# EAGLE board umoto_panelized_5x5cm (EAGLE 5.12)
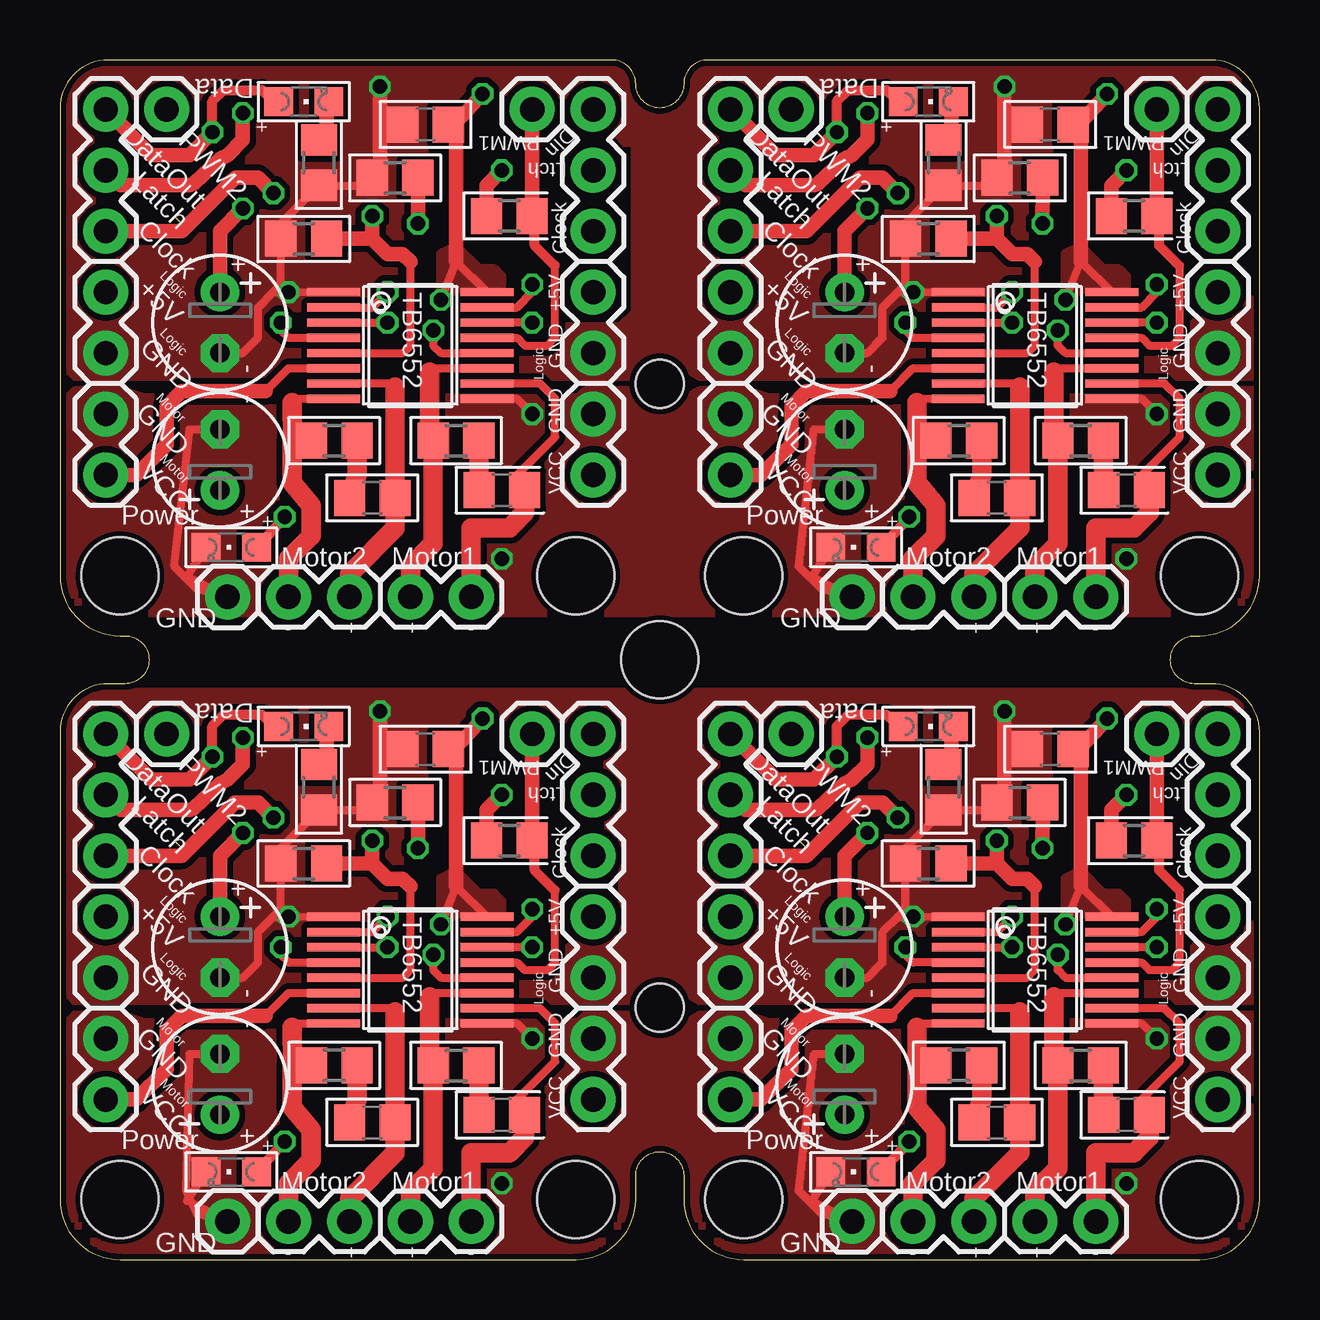
[diagram p0: board, top side]
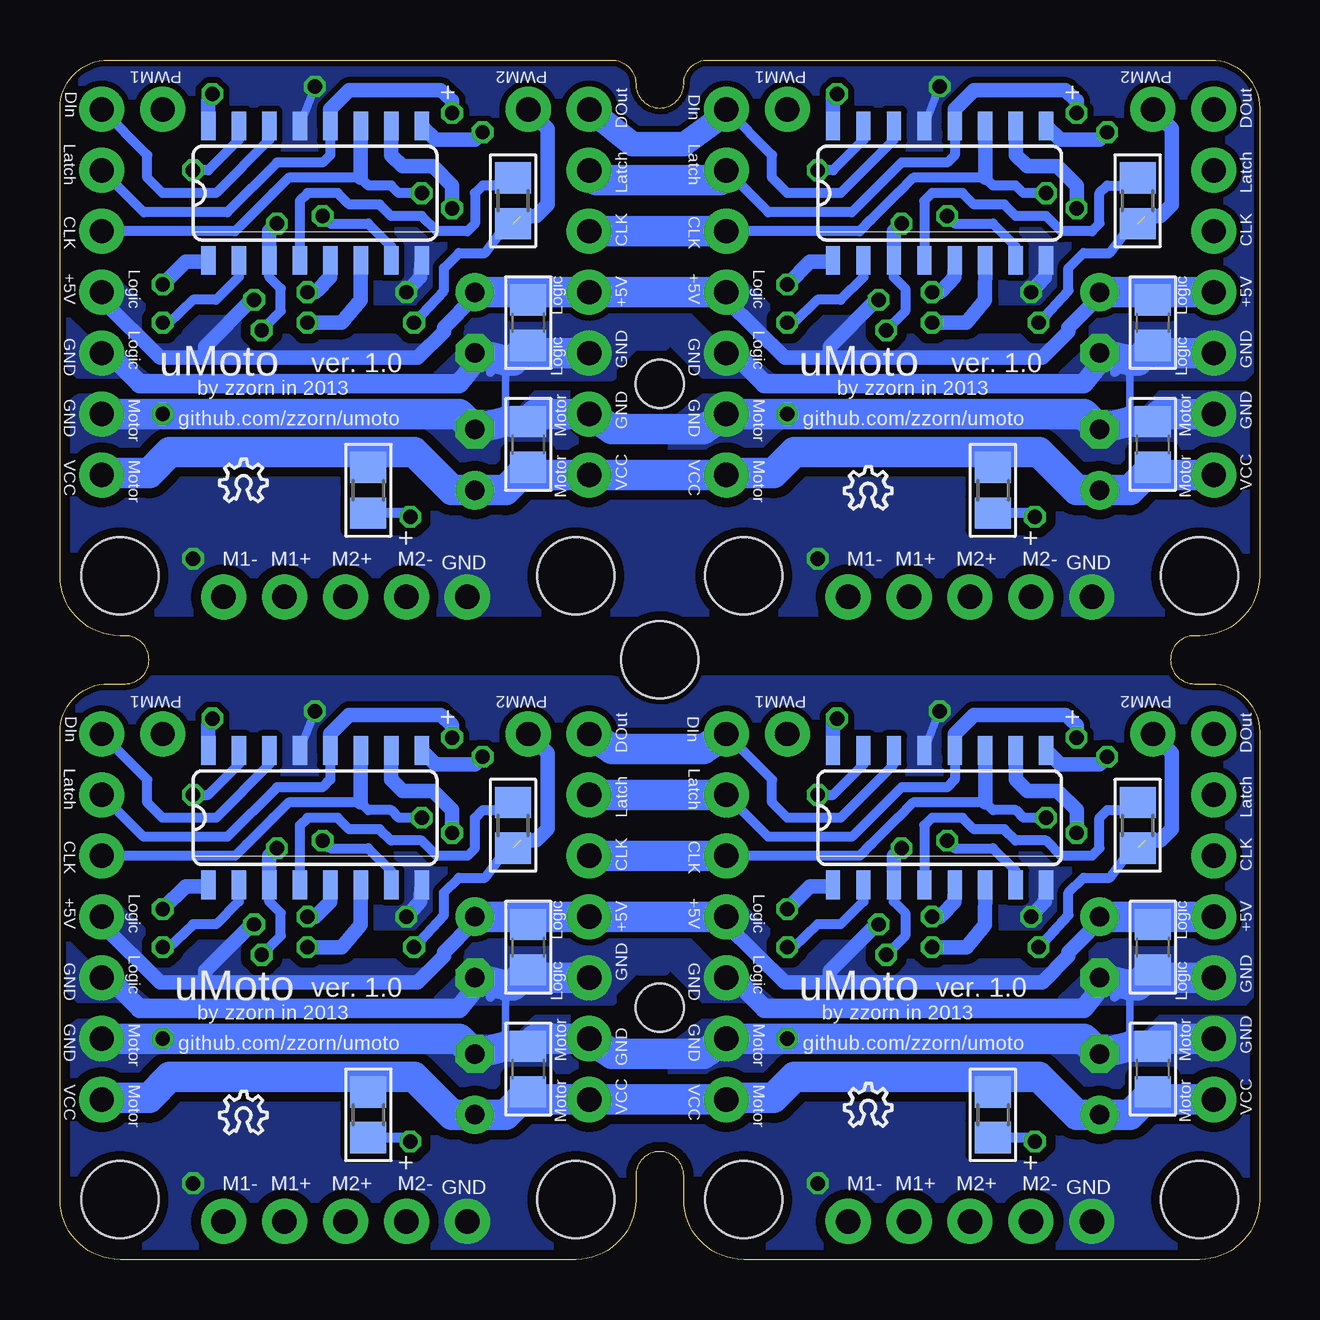
[diagram p1: board, bottom side, seen from below]

Size 50 x 50 mm. Coordinates in mm from the lower left corner, seen from the top.
Outline: 0,2.5 arc90 2.5,0 21.5,0 arc90 24,2.5 24,3.5 arc-180 26,3.5 26,2.5 arc90 28.5,0 47.5,0 arc90 50,2.5 50,22 arc90 48,24 47.29,24 arc-180 47.29,26 47.5,26 arc90 50,28.5 50,48 arc90 48,50 27,50 arc90 26,49 arc-180 24,49 arc90 23,50 2,50 arc90 0,48 0,28.5 arc90 2.5,26 2.71,26 arc-180 2.71,24 2,24 arc90 0,22 0,2.5
Copper layers (1*16): Top 0.035mm / dielectric 0.2mm / Bottom 0.035mm
Design rules "SeeedStudio_DRU_no_angle_20130527 *": minimum track width 6mil, minimum drill 12mil, track to track 6mil, track to pad 6mil, pad to pad 6mil, via to via 6mil, smd to smd 0mil, copper to edge 10mil, drill to drill 10mil, minimum pad ring 6mil, minimum via ring 6mil, stop-mask expansion 2mil, vias tented up to drill 25mil, thermal gap 10mil
Holes 3.2 mm at 21.5,2.5 2.5,2.5 47.5,2.5 28.5,2.5 21.5,28.5 2.5,28.5 47.5,28.5 28.5,28.5 25,25
Holes 2 mm at 25,10.5 25,36.5

## Footprints (pad centres in the part's own frame; a part is rotated, then mirrored left to right if it is on the bottom)
1X02 = drill 1.016 pad 1.88 round: 1 0,0; 2 2.54,0
C0805 = smd 1.3 x 1.5: 1 -0.95,0; 2 0.95,0
E2,5-6 = drill 0.813 pad 1.6 round: + -1.27,0 | drill 0.813 pad 1.6 octagon: - 1.27,0
1X03 = drill 1.016 pad 1.88 round: 1 0,0; 2 2.54,0; 3 5.08,0
SSOP16 = smd 2.2 x 0.35: P$1 -3.2,2.223; P$2 -3.2,1.587; P$3 -3.2,0.953; P$4 -3.2,0.318; P$5 -3.2,-0.318; P$6 -3.2,-0.953; P$7 -3.2,-1.587; P$8 -3.2,-2.223; P$9 3.2,-2.223; P$10 3.2,-1.587; P$11 3.2,-0.953; P$12 3.2,-0.318; P$13 3.2,0.318; P$14 3.2,0.953; P$15 3.2,1.587; P$16 3.2,2.223
1X01 = drill 1.016 pad 1.88 round: 1 0,0
SO16 = smd 0.6 x 1.2: 1 -4.445,-2.8; 2 -3.175,-2.8; 3 -1.905,-2.8; 4 -0.635,-2.8; 5 0.635,-2.8; 6 1.905,-2.8; 7 3.175,-2.8; 8 4.445,-2.8; 9 4.445,2.8; 10 3.175,2.8; 11 1.905,2.8; 12 0.635,2.8; 13 -0.635,2.8; 14 -1.905,2.8; 15 -3.175,2.8; 16 -4.445,2.8
CHIPLED_0805 = smd 1.2 x 1.2: A 0,-1.05; C 0,1.05
R0805 = smd 1.3 x 1.5: 1 -0.95,0; 2 0.95,0

## Placement (x,y rotation side)
5V_PWR  [1X02]  1.91,14.29 270 top
5V_PWR1  [1X02]  22.23,14.29 270 top
5V_PWR2  [1X02]  27.94,14.29 270 top
5V_PWR3  [1X02]  48.26,14.29 270 top
5V_PWR4  [1X02]  1.91,40.32 270 top
5V_PWR5  [1X02]  22.23,40.32 270 top
5V_PWR6  [1X02]  27.94,40.32 270 top
5V_PWR7  [1X02]  48.26,40.32 270 top
C1  100nF  [C0805]  4.45,13.02 270 bottom
C2  100nF  [C0805]  13.02,5.71 180 top
C3  100nF  [C0805]  18.41,6.03 180 top
C4  100nF  [C0805]  30.48,13.02 270 bottom
C5  100uF  [E2,5-6]  6.67,7.3 90 top
C6  100uF  [E2,5-6]  32.7,7.3 90 top
C7  100uF  [E2,5-6]  32.7,13.02 270 top
C8  100uF  [E2,5-6]  6.67,13.02 270 top
C9  100nF  [C0805]  4.45,7.94 90 bottom
C10  100nF  [C0805]  15.24,21.27 180 top
C11  100nF  [C0805]  30.48,7.94 90 bottom
C12  100nF  [C0805]  41.27,21.27 180 top
C13  100nF  [C0805]  39.05,5.71 180 top
C14  100nF  [C0805]  44.45,6.03 180 top
C15  100nF  [C0805]  4.45,39.05 270 bottom
C16  100uF  [E2,5-6]  6.67,33.34 90 top
C17  100uF  [E2,5-6]  6.67,39.05 270 top
C18  100nF  [C0805]  4.45,33.97 90 bottom
C19  100nF  [C0805]  15.24,47.31 180 top
C20  100nF  [C0805]  13.02,31.75 180 top
C21  100nF  [C0805]  18.41,32.07 180 top
C22  100nF  [C0805]  30.48,39.05 270 bottom
C23  100uF  [E2,5-6]  32.7,33.34 90 top
C24  100uF  [E2,5-6]  32.7,39.05 270 top
C25  100nF  [C0805]  30.48,33.97 90 bottom
C26  100nF  [C0805]  41.27,47.31 180 top
C27  100nF  [C0805]  39.05,31.75 180 top
C28  100nF  [C0805]  44.45,32.07 180 top
COMM_IN  [1X03]  22.23,21.91 270 top
COMM_IN1  [1X03]  48.26,21.91 270 top
COMM_IN2  [1X03]  22.23,47.94 270 top
COMM_IN3  [1X03]  48.26,47.94 270 top
COMM_OUT  [1X03]  1.91,21.91 270 top
COMM_OUT1  [1X03]  27.94,21.91 270 top
COMM_OUT2  [1X03]  1.91,47.94 270 top
COMM_OUT3  [1X03]  27.94,47.94 270 top
DRV1  TB6552FN  [SSOP16]  14.61,12.06 0 top
DRV2  TB6552FN  [SSOP16]  40.64,12.06 0 top
DRV3  TB6552FN  [SSOP16]  14.61,38.1 0 top
DRV4  TB6552FN  [SSOP16]  40.64,38.1 0 top
GND  M01PTH  [1X01]  6.99,1.59 0 top
GND1  M01PTH  [1X01]  33.02,1.59 0 top
GND2  M01PTH  [1X01]  6.99,27.62 0 top
GND3  M01PTH  [1X01]  33.02,27.62 0 top
IC1  74LS595D  [SO16]  39.37,18.41 0 bottom
IC2  74LS595D  [SO16]  13.34,44.45 0 bottom
IC3  74LS595D  [SO16]  13.34,18.41 0 bottom
IC4  74LS595D  [SO16]  39.37,44.45 0 bottom
LED1  [CHIPLED_0805]  7.14,3.65 90 top
LED2  [CHIPLED_0805]  10.16,22.23 270 top
LED3  [CHIPLED_0805]  33.18,3.65 90 top
LED4  [CHIPLED_0805]  36.2,22.23 270 top
LED5  [CHIPLED_0805]  7.14,29.69 90 top
LED6  [CHIPLED_0805]  10.16,48.26 270 top
LED7  [CHIPLED_0805]  33.18,29.69 90 top
LED8  [CHIPLED_0805]  36.2,48.26 270 top
LOGO1  OSHW_LOGO_6MILX0070-NT  [OSHW_6X70_NOTEXT]  17.3,5.56 0 bottom
LOGO2  OSHW_LOGO_6MILX0070-NT  [OSHW_6X70_NOTEXT]  43.34,5.24 0 bottom
LOGO3  OSHW_LOGO_6MILX0070-NT  [OSHW_6X70_NOTEXT]  17.3,31.27 0 bottom
LOGO4  OSHW_LOGO_6MILX0070-NT  [OSHW_6X70_NOTEXT]  43.34,31.59 0 bottom
M1  [1X02]  14.61,1.59 0 top
M2  [1X02]  9.53,1.59 0 top
M3  [1X02]  35.56,1.59 0 top
M4  [1X02]  40.64,1.59 0 top
M5  [1X02]  9.53,27.62 0 top
M6  [1X02]  14.61,27.62 0 top
M7  [1X02]  35.56,27.62 0 top
M8  [1X02]  40.64,27.62 0 top
MOTOR_POWER  [1X02]  1.91,9.21 270 top
MOTOR_POWER1  [1X02]  22.23,9.21 270 top
MOTOR_POWER2  [1X02]  27.94,9.21 270 top
MOTOR_POWER3  [1X02]  48.26,9.21 270 top
MOTOR_POWER4  [1X02]  1.91,35.24 270 top
MOTOR_POWER5  [1X02]  22.23,35.24 270 top
MOTOR_POWER6  [1X02]  27.94,35.24 270 top
MOTOR_POWER7  [1X02]  48.26,35.24 270 top
PWM1  M01PTH  [1X01]  19.68,21.91 0 top
PWM2  M01PTH  [1X01]  4.45,21.91 0 top
PWM3  M01PTH  [1X01]  30.48,21.91 0 top
PWM4  M01PTH  [1X01]  45.72,21.91 0 top
PWM5  M01PTH  [1X01]  4.45,47.94 0 top
PWM6  M01PTH  [1X01]  19.68,47.94 0 top
PWM7  M01PTH  [1X01]  30.48,47.94 0 top
PWM8  M01PTH  [1X01]  45.72,47.94 0 top
R1  47R  [R0805]  11.43,8.1 0 top
R2  150R  [R0805]  11.11,6.03 90 bottom
R3  47R  [R0805]  16.51,8.09 0 top
R4  10kR  [R0805]  5.08,18.1 270 bottom
R5  10kR  [R0805]  18.73,17.46 180 top
R6  10kR  [R0805]  10.16,16.51 0 top
R7  10kR  [R0805]  13.97,19.05 0 top
R8  820R  [R0805]  10.79,19.68 90 top
R9  150R  [R0805]  37.15,6.03 90 bottom
R10  10kR  [R0805]  31.11,18.1 270 bottom
R11  10kR  [R0805]  44.77,17.46 180 top
R12  10kR  [R0805]  40.01,19.05 0 top
R13  10kR  [R0805]  36.2,16.51 0 top
R14  820R  [R0805]  36.83,19.68 90 top
R15  47R  [R0805]  37.47,8.1 0 top
R16  47R  [R0805]  42.55,8.09 0 top
R17  150R  [R0805]  11.11,32.07 90 bottom
R18  10kR  [R0805]  5.08,44.13 270 bottom
R19  10kR  [R0805]  18.73,43.5 180 top
R20  10kR  [R0805]  13.97,45.09 0 top
R21  10kR  [R0805]  10.16,42.55 0 top
R22  820R  [R0805]  10.79,45.72 90 top
R23  47R  [R0805]  11.43,34.13 0 top
R24  47R  [R0805]  16.51,34.13 0 top
R25  150R  [R0805]  37.15,32.07 90 bottom
R26  10kR  [R0805]  31.11,44.13 270 bottom
R27  10kR  [R0805]  44.77,43.5 180 top
R28  10kR  [R0805]  40.01,45.09 0 top
R29  10kR  [R0805]  36.2,42.55 0 top
R30  820R  [R0805]  36.83,45.72 90 top
R31  47R  [R0805]  37.47,34.13 0 top
R32  47R  [R0805]  42.55,34.13 0 top

## Library data of the parts
5V_PWR 5V_PWR1-5V_PWR7 COMM_IN COMM_IN1-COMM_IN3 COMM_OUT COMM_OUT1-COMM_OUT3 GND GND1-GND3 IC1-IC4 M1-M8 MOTOR_POWER MOTOR_POWER1-MOTOR_POWER7 PWM1-PWM8 = SparkFun
C1-C28 R1-R32 = rcl
DRV1-DRV4 = TB6552
LED1-LED8 = led
LOGO1-LOGO4 = ohw-logo

## Nets
+5V: 5V_PWR1.1 5V_PWR.1 C1.1 C8.+ C10.1 DRV1.P$16 IC3.10 IC3.16
+5V1: 5V_PWR2.1 5V_PWR3.1 C4.1 C7.+ C12.1 DRV2.P$16 IC1.10 IC1.16
+5V2: 5V_PWR4.1 5V_PWR5.1 C15.1 C17.+ C19.1 DRV3.P$16 IC2.10 IC2.16
+5V3: 5V_PWR6.1 5V_PWR7.1 C22.1 C24.+ C26.1 DRV4.P$16 IC4.10 IC4.16
CLOCK: COMM_IN.3 COMM_OUT.3 IC3.11
CLOCK1: COMM_IN1.3 COMM_OUT1.3 IC1.11
CLOCK2: COMM_IN2.3 COMM_OUT2.3 IC2.11
CLOCK3: COMM_IN3.3 COMM_OUT3.3 IC4.11
DATA_IN: COMM_IN.1 IC3.14
DATA_IN1: COMM_IN1.1 IC1.14
DATA_IN2: COMM_IN2.1 IC2.14
DATA_IN3: COMM_IN3.1 IC4.14
DATA_OUT: COMM_OUT.1 IC3.9 LED2.A
DATA_OUT1: COMM_OUT1.1 IC1.9 LED4.A
DATA_OUT2: COMM_OUT2.1 IC2.9 LED6.A
DATA_OUT3: COMM_OUT3.1 IC4.9 LED8.A
GND: 5V_PWR1.2 5V_PWR.2 C1.2 C5.- C8.- C9.2 C10.2 DRV1.P$1 DRV1.P$9 GND.1 IC3.8 IC3.13 LED1.C MOTOR_POWER1.1 MOTOR_POWER.1 R6.1 R7.1 R8.1
GND1: 5V_PWR2.2 5V_PWR3.2 C4.2 C6.- C7.- C11.2 C12.2 DRV2.P$1 DRV2.P$9 GND1.1 IC1.8 IC1.13 LED3.C MOTOR_POWER2.1 MOTOR_POWER3.1 R12.1 R13.1 R14.1
GND2: 5V_PWR4.2 5V_PWR5.2 C15.2 C16.- C17.- C18.2 C19.2 DRV3.P$1 DRV3.P$9 GND2.1 IC2.8 IC2.13 LED5.C MOTOR_POWER4.1 MOTOR_POWER5.1 R20.1 R21.1 R22.1
GND3: 5V_PWR6.2 5V_PWR7.2 C22.2 C23.- C24.- C25.2 C26.2 DRV4.P$1 DRV4.P$9 GND3.1 IC4.8 IC4.13 LED7.C MOTOR_POWER6.1 MOTOR_POWER7.1 R28.1 R29.1 R30.1
LATCH: COMM_IN.2 COMM_OUT.2 IC3.12
LATCH1: COMM_IN1.2 COMM_OUT1.2 IC1.12
LATCH2: COMM_IN2.2 COMM_OUT2.2 IC2.12
LATCH3: COMM_IN3.2 COMM_OUT3.2 IC4.12
M1IN1: DRV1.P$15 IC3.1
M1IN2: DRV1.P$14 IC3.2
M1IN3: DRV2.P$15 IC1.1
M1IN4: DRV2.P$14 IC1.2
M1IN5: DRV3.P$15 IC2.1
M1IN6: DRV3.P$14 IC2.2
M1IN7: DRV4.P$15 IC4.1
M1IN8: DRV4.P$14 IC4.2
M1PWM: IC3.15 R5.2
M1PWM1: IC1.15 R11.2
M1PWM2: IC2.15 R19.2
M1PWM3: IC4.15 R27.2
M1STDBY: DRV1.P$12 IC3.3 R7.2
M1STDBY1: DRV2.P$12 IC1.3 R12.2
M1STDBY2: DRV3.P$12 IC2.3 R20.2
M1STDBY3: DRV4.P$12 IC4.3 R28.2
M2IN1: DRV1.P$2 IC3.5
M2IN2: DRV1.P$3 IC3.6
M2IN3: DRV2.P$2 IC1.5
M2IN4: DRV2.P$3 IC1.6
M2IN5: DRV3.P$2 IC2.5
M2IN6: DRV3.P$3 IC2.6
M2IN7: DRV4.P$2 IC4.5
M2IN8: DRV4.P$3 IC4.6
M2PWM: IC3.4 R4.1
M2PWM1: IC1.4 R10.1
M2PWM2: IC2.4 R18.1
M2PWM3: IC4.4 R26.1
M2STDBY: DRV1.P$5 IC3.7 R6.2
M2STDBY1: DRV2.P$5 IC1.7 R13.2
M2STDBY2: DRV3.P$5 IC2.7 R21.2
M2STDBY3: DRV4.P$5 IC4.7 R29.2
MOTOR_1+: DRV1.P$11 M1.1 R3.1
MOTOR_1+1: DRV2.P$11 M4.1 R16.1
MOTOR_1+2: DRV3.P$11 M6.1 R24.1
MOTOR_1+3: DRV4.P$11 M8.1 R32.1
MOTOR_1-: C3.1 DRV1.P$10 M1.2
MOTOR_1-1: C14.1 DRV2.P$10 M4.2
MOTOR_1-2: C21.1 DRV3.P$10 M6.2
MOTOR_1-3: C28.1 DRV4.P$10 M8.2
MOTOR_2+: C2.1 DRV1.P$7 M2.2
MOTOR_2+1: C13.1 DRV2.P$7 M3.2
MOTOR_2+2: C20.1 DRV3.P$7 M5.2
MOTOR_2+3: C27.1 DRV4.P$7 M7.2
MOTOR_2-: DRV1.P$8 M2.1 R1.1
MOTOR_2-1: DRV2.P$8 M3.1 R15.1
MOTOR_2-2: DRV3.P$8 M5.1 R23.1
MOTOR_2-3: DRV4.P$8 M7.1 R31.1
N$1: LED1.A R2.1
N$2: LED4.C R14.2
N$3: C2.2 R1.2
N$4: C13.2 R15.2
N$5: C14.2 R16.2
N$6: C3.2 R3.2
N$7: LED3.A R9.1
N$8: LED6.C R22.2
N$9: C20.2 R23.2
N$10: LED2.C R8.2
N$11: C21.2 R24.2
N$12: LED5.A R17.1
N$13: LED8.C R30.2
N$14: C27.2 R31.2
N$15: C28.2 R32.2
N$16: LED7.A R25.1
PWM_1: DRV1.P$13 PWM1.1 R5.1
PWM_2: DRV1.P$4 PWM2.1 R4.2
PWM_3: DRV2.P$13 PWM4.1 R11.1
PWM_4: DRV2.P$4 PWM3.1 R10.2
PWM_5: DRV3.P$13 PWM6.1 R19.1
PWM_6: DRV3.P$4 PWM5.1 R18.2
PWM_7: DRV4.P$13 PWM8.1 R27.1
PWM_8: DRV4.P$4 PWM7.1 R26.2
VCC: C5.+ C9.1 DRV1.P$6 MOTOR_POWER1.2 MOTOR_POWER.2 R2.2
VCC1: C6.+ C11.1 DRV2.P$6 MOTOR_POWER2.2 MOTOR_POWER3.2 R9.2
VCC2: C16.+ C18.1 DRV3.P$6 MOTOR_POWER4.2 MOTOR_POWER5.2 R17.2
VCC3: C23.+ C25.1 DRV4.P$6 MOTOR_POWER6.2 MOTOR_POWER7.2 R25.2

## Tracks (layer width: path | path; a pad name or v marks a point on that pad's centre or on a via)
+5V  (via drill 0.6)
  Top 0.343: DRV1.P$16 16.51,15.56 v15.88,13.97 | C10.1 16.26,21.37 16.52,21.37
  Top 0.61: v7.62,17.78 6.67,16.83 C8.+ | v17.61,22.55 16.52,21.37 16.51,21.1 16.51,15.56
  Bottom 0.406: 17.76,22.3 17.78,22.28
  Bottom 0.61: 6.71,14.21 6.71,14.05 7.96,12.8 7.96,12.65 9.05,11.56 17.92,11.56 | 17.92,11.56 19.78,11.56 22.21,13.96 5V_PWR1.1 | 17.92,11.56 17.92,12.03 15.97,13.97 v15.88,13.97 | IC3.10 10.16,20 9.69,19.53 8.42,19.53 7.62,18.73 v7.62,17.78 | v17.61,22.55 17.76,22.3 | 17.78,22.28 IC3.16
  Bottom 0.813: C8.+ 6.71,14.21 | 6.71,14.21
  Bottom 1.27: 5V_PWR.1 4.44,14.29 C1.1 4.48,14.28 C8.+ | 5V_PWR1.1 27.94,14.29
  pour Top (isolate 0.406, no thermals): 18.41,14.61 18.41,14.92 18.1,15.24 17.46,15.24 16.51,16.19 15.88,15.88 15.88,14.29 16.19,14.29
  pour Bottom (isolate 0.406, no thermals): 9.2,11.56 9.05,11.72 8.43,12.34 14.65,12.34 16.52,12.34 16.52,13.12 19.94,13.12 21.96,14.98 22.12,13.74 20.09,11.87 19.63,11.56
+5V1  (via drill 0.6)
  Top 0.343: DRV2.P$16 42.55,15.56 v41.91,13.97 | C12.1 42.3,21.37 42.56,21.37
  Top 0.61: v33.66,17.78 32.7,16.83 C7.+ | v43.65,22.55 42.56,21.37 42.55,21.1 42.55,15.56
  Bottom 0.406: 43.8,22.3 43.81,22.28
  Bottom 0.61: 32.75,14.21 32.75,14.05 33.99,12.8 33.99,12.65 35.08,11.56 43.95,11.56 | 43.95,11.56 45.82,11.56 48.25,13.96 5V_PWR3.1 | 43.95,11.56 43.95,12.03 42.01,13.97 v41.91,13.97 | IC1.10 36.2,20 35.72,19.53 34.45,19.53 33.66,18.73 v33.66,17.78 | v43.65,22.55 43.8,22.3 | 43.81,22.28 IC1.16
  Bottom 0.813: C7.+ 32.75,14.21 | 32.75,14.21
  Bottom 1.27: 5V_PWR2.1 30.47,14.29 C4.1 30.52,14.28 C7.+
  pour Top (isolate 0.406, no thermals): 44.45,14.61 44.45,14.92 44.13,15.24 43.5,15.24 42.55,16.19 41.91,15.88 41.91,14.29 42.23,14.29
  pour Bottom (isolate 0.406, no thermals): 35.24,11.56 35.08,11.72 34.46,12.34 40.68,12.34 42.55,12.34 42.55,13.12 45.97,13.12 48,14.98 48.15,13.74 46.13,11.87 45.66,11.56
+5V2  (via drill 0.6)
  Top 0.343: DRV3.P$16 16.51,41.59 v15.88,40.01 | C19.1 16.26,47.41 16.52,47.41
  Top 0.61: v7.62,43.81 6.67,42.86 C17.+ | v17.61,48.58 16.52,47.41 16.51,47.14 16.51,41.59
  Bottom 0.406: 17.76,48.33 17.78,48.31
  Bottom 0.61: 6.71,40.24 6.71,40.08 7.96,38.84 7.96,38.68 9.05,37.59 17.92,37.59 | 17.92,37.59 19.78,37.59 22.21,39.99 5V_PWR5.1 | 17.92,37.59 17.92,38.06 15.97,40.01 v15.88,40.01 | IC2.10 10.16,46.04 9.69,45.56 8.42,45.56 7.62,44.77 v7.62,43.81 | v17.61,48.58 17.76,48.33 | 17.78,48.31 IC2.16
  Bottom 0.813: C17.+ 6.71,40.24 | 6.71,40.24
  Bottom 1.27: 5V_PWR4.1 4.44,40.32 C15.1 4.48,40.31 C17.+ | 5V_PWR5.1 27.94,40.32
  pour Top (isolate 0.406, no thermals): 18.41,40.64 18.41,40.96 18.1,41.27 17.46,41.27 16.51,42.23 15.88,41.91 15.88,40.32 16.19,40.32
  pour Bottom (isolate 0.406, no thermals): 9.2,37.6 9.05,37.75 8.43,38.37 14.65,38.37 16.52,38.37 16.52,39.15 19.94,39.15 21.96,41.02 22.12,39.77 20.09,37.91 19.63,37.6
+5V3  (via drill 0.6)
  Top 0.343: DRV4.P$16 42.55,41.59 v41.91,40.01 | C26.1 42.3,47.41 42.56,47.41
  Top 0.61: v33.66,43.81 32.7,42.86 C24.+ | v43.65,48.58 42.56,47.41 42.55,47.14 42.55,41.59
  Bottom 0.406: 43.8,48.33 43.81,48.31
  Bottom 0.61: 32.75,40.24 32.75,40.08 33.99,38.84 33.99,38.68 35.08,37.59 43.95,37.59 | 43.95,37.59 45.82,37.59 48.25,39.99 5V_PWR7.1 | 43.95,37.59 43.95,38.06 42.01,40.01 v41.91,40.01 | IC4.10 36.2,46.04 35.72,45.56 34.45,45.56 33.66,44.77 v33.66,43.81 | v43.65,48.58 43.8,48.33 | 43.81,48.31 IC4.16
  Bottom 0.813: C24.+ 32.75,40.24 | 32.75,40.24
  Bottom 1.27: 5V_PWR6.1 30.47,40.32 C22.1 30.52,40.31 C24.+
  pour Top (isolate 0.406, no thermals): 44.45,40.64 44.45,40.96 44.13,41.27 43.5,41.27 42.55,42.23 41.91,41.91 41.91,40.32 42.23,40.32
  pour Bottom (isolate 0.406, no thermals): 35.24,37.6 35.08,37.75 34.46,38.37 40.68,38.37 42.55,38.37 42.55,39.15 45.97,39.15 48,41.02 48.15,39.77 46.13,37.91 45.66,37.6
CLOCK  (via drill 0.6)
  Top 0.61: v8.89,18.41 8.26,19.05 7.3,19.05 5.08,16.83 COMM_OUT.3
  Bottom 0.406: v8.89,18.41 9.84,18.41 10.16,18.73 11.11,18.73 11.43,19.05 14.44,19.05 15.08,18.41 16.19,17.31 16.19,17.3 16.67,16.83 COMM_IN.3
  Bottom 0.61: 11.43,19.05 IC3.11
  Bottom 1.27: COMM_IN.3 27.94,16.83
CLOCK1  (via drill 0.6)
  Top 0.61: v34.92,18.41 34.29,19.05 33.34,19.05 31.11,16.83 COMM_OUT1.3
  Bottom 0.406: v34.92,18.41 35.88,18.41 36.2,18.73 37.15,18.73 37.47,19.05 40.48,19.05 41.11,18.41 41.12,18.41 42.23,17.31 42.23,17.3 42.7,16.83 COMM_IN1.3
  Bottom 0.61: 37.47,19.05 IC1.11
CLOCK2  (via drill 0.6)
  Top 0.61: v8.89,44.45 8.26,45.09 7.3,45.09 5.08,42.86 COMM_OUT2.3
  Bottom 0.406: v8.89,44.45 9.84,44.45 10.16,44.77 11.11,44.77 11.43,45.09 14.44,45.09 15.08,44.45 16.19,43.34 16.67,42.86 COMM_IN2.3
  Bottom 0.61: 11.43,45.09 IC2.11
  Bottom 1.27: COMM_IN2.3 27.94,42.86
CLOCK3  (via drill 0.6)
  Top 0.61: v34.92,44.45 34.29,45.09 33.34,45.09 31.11,42.86 COMM_OUT3.3
  Bottom 0.406: v34.92,44.45 35.88,44.45 36.2,44.77 37.15,44.77 37.47,45.09 40.48,45.09 41.11,44.45 41.12,44.45 42.23,43.34 42.7,42.86 COMM_IN3.3
  Bottom 0.61: 37.47,45.09 IC4.11
DATA_IN
  Bottom 0.406: COMM_IN.1 20.32,20 20.32,19.05 19.68,18.41 17.46,18.41 15.24,20.64 IC3.14
  Bottom 1.27: COMM_IN.1 23.18,21.27 26.99,21.27 27.94,21.91
DATA_IN1
  Bottom 0.406: COMM_IN1.1 46.35,20 46.35,19.05 45.72,18.41 43.5,18.41 41.27,20.64 IC1.14
DATA_IN2
  Bottom 0.406: COMM_IN2.1 20.32,46.04 20.32,45.09 19.68,44.45 17.46,44.45 15.24,46.67 IC2.14
  Bottom 1.016: 22.23,47.77 24,46.5 26.14,46.5 27.94,47.94
  Bottom 1.27: COMM_IN2.1 22.23,47.77
DATA_IN3
  Bottom 0.406: COMM_IN3.1 46.35,46.04 46.35,45.09 45.72,44.45 43.5,44.45 41.27,46.67 IC4.14
DATA_OUT  (via drill 0.6)
  Top 0.406: LED2.A 8.8,22.32 8.41,22.71 6.82,22.71 6.35,22.24 v6.35,20.95
  Top 0.61: COMM_OUT.1 3.81,20 5.4,20 v6.35,20.95
  Bottom 0.61: v6.35,20.95 6.67,20.64 8.31,20.64 IC3.9
DATA_OUT1  (via drill 0.6)
  Top 0.406: LED4.A 34.83,22.32 34.45,22.71 32.86,22.71 32.38,22.24 v32.38,20.95
  Top 0.61: COMM_OUT1.1 29.84,20 31.43,20 v32.38,20.95
  Bottom 0.61: v32.38,20.95 32.7,20.64 34.35,20.64 IC1.9
DATA_OUT2  (via drill 0.6)
  Top 0.406: LED6.A 8.8,48.36 8.41,48.75 6.82,48.75 6.35,48.27 v6.35,46.99
  Top 0.61: COMM_OUT2.1 3.81,46.04 5.4,46.04 v6.35,46.99
  Bottom 0.61: v6.35,46.99 6.67,46.67 8.31,46.67 IC2.9
DATA_OUT3  (via drill 0.6)
  Top 0.406: LED8.A 34.83,48.36 34.45,48.75 32.86,48.75 32.38,48.27 v32.38,46.99
  Top 0.61: COMM_OUT3.1 29.84,46.04 31.43,46.04 v32.38,46.99
  Bottom 0.61: v32.38,46.99 32.7,46.67 34.35,46.67 IC4.9
GND  (via drill 0.6)
  Top 0.305: v9.53,14.29 DRV1.P$1
  Top 0.343: 10.79,18.41 11.43,18.73 12.38,18.73 R7.1 13.34,19.05 | 8.89,14.29 v9.53,14.29 | 8.89,14.29 8.26,13.65 8.26,12.38 7.62,11.75 C8.- | 8.89,14.29 9.21,14.61 R6.1 9.21,17.14 10.48,18.41 10.79,18.41 | DRV1.P$9 19.05,9.84 v19.68,9.21 | C5.- 5.4,8.57 5.26,2.86 5.71,1.91 GND.1 5.3,2.44 LED1.C | 10.79,18.41 R8.1
  Top 0.61: 13.34,19.05 13.34,21.27 | 13.34,21.27 v13.34,22.86 | 13.34,21.27 C10.2
  Bottom 0.305: 5.4,8.89 5.4,11.43
  Bottom 0.343: v13.34,22.86 IC3.13
  Bottom 0.381: 6.03,10.93 5.98,10.98
  Bottom 0.61: 21.91,11.75 5V_PWR1.2 | IC3.8 8.95,14.92 v9.53,14.29
  Bottom 0.813: 21.91,11.75 20.64,10.48 7.33,10.48 6.68,11.28 C8.-
  Bottom 1.27: 5V_PWR.2 4.12,11.75 C1.2 5.08,11.43 5.4,11.43 C8.- | MOTOR_POWER.1 4.12,9.21 C9.2 5.4,8.89 C5.- 7.32,9.21 v19.68,9.21 MOTOR_POWER1.1 23.18,8.57 26.99,8.57 27.94,9.21
  other vias: 18.41,3.17
  pour Bottom (isolate 0.254, no thermals): 0.32,23.81 3.81,24.13 23.18,24.13 24.45,23.5 24.45,17.46 22.86,16.46 16.84,16.65 14.45,13.95 7.56,13.95 6.92,13.32 6.93,12.06 8.26,10.79 0.64,10.79 -0.32,11.75 -0.32,23.18
  pour Top (isolate 0.254, no thermals): 0.64,10.79 -0.32,11.75 -0.32,23.18 0.32,23.63 23.81,23.63 24.77,23.18 24.77,12.38 23.5,13.65 23.5,17.78 15.56,17.78 14.61,16.83 14.61,14.92 13.97,14.29 13.97,12.7 14.61,12.06 20.32,12.06 21.59,13.34 23.5,13.34 24.77,12.06 24.77,11.75 23.81,10.79
  pour Top (isolate 0.254, no thermals): 0.64,10.16 -0.32,9.21 -0.32,1.91 1.27,-0.32 23.18,-0.32 24.77,1.91 24.77,9.21 23.81,10.16 21.91,10.16 21.59,9.84 3.49,9.84 2.54,10.16
  pour Bottom (isolate 0.406, no thermals): 0.64,10 -0.32,9.05 -0.32,1.91 1.27,-0.32 22.86,-0.32 24.45,1.91 24.45,8.89 23.18,9.84 21.91,9.84 20.95,9.21 4.88,9.21 4.1,10
  pour Bottom (isolate 0.254, no thermals): 20.32,10.79 23.18,10.79 24.45,12.06 24.45,17.14 23.5,16.51 22.23,16.51 22.86,16.19 23.81,15.24 23.81,13.34 22.86,12.38 22.23,12.38
GND1  (via drill 0.6)
  Top 0.305: v35.56,14.29 DRV2.P$1
  Top 0.343: 36.83,18.41 37.47,18.73 38.42,18.73 R12.1 39.37,19.05 | 34.92,14.29 v35.56,14.29 | 34.92,14.29 34.29,13.65 34.29,12.38 33.66,11.75 C7.- | 34.92,14.29 35.24,14.61 R13.1 35.24,17.14 36.51,18.41 36.83,18.41 | DRV2.P$9 45.09,9.84 v45.72,9.21 | C6.- 31.43,8.57 30.8,2.86 31.75,1.91 GND1.1 31.34,2.44 LED3.C | 36.83,18.41 R14.1
  Top 0.61: 39.37,19.05 39.37,21.27 | 39.37,21.27 v39.37,22.86 | 39.37,21.27 C12.2
  Bottom 0.305: 31.43,8.89 31.43,11.43
  Bottom 0.343: v39.37,22.86 IC1.13
  Bottom 0.381: 32.07,10.93 32.02,10.98
  Bottom 0.61: 47.94,11.75 5V_PWR3.2 | IC1.8 34.98,14.92 v35.56,14.29
  Bottom 0.813: 47.94,11.75 46.67,10.48 33.36,10.48 32.72,11.28 C7.-
  Bottom 1.27: MOTOR_POWER3.1 v45.72,9.21 33.36,9.21 32.72,8.57 C6.- 31.43,8.89 C11.2 30.16,9.21 MOTOR_POWER2.1 | 5V_PWR2.2 30.16,11.75 C4.2 31.12,11.43 31.43,11.43 C7.-
  other vias: 44.45,3.17
  pour Bottom (isolate 0.254, no thermals): 26.99,24.13 50.16,24.13 50.48,23.5 50.48,17.46 48.9,16.46 42.87,16.65 40.49,13.95 33.59,13.95 32.96,13.32 32.97,12.06 34.29,10.79 26.99,10.79 26.99,11.11 26.04,12.06 24.77,12.06 24.77,23.5
  pour Top (isolate 0.254, no thermals): 26.67,10.79 25.08,11.75 25.08,23.18 26.35,23.63 49.21,23.63 50.48,22.86 50.48,12.06 49.53,13.65 49.53,17.78 41.59,17.78 40.64,16.83 40.64,14.92 40.01,14.29 40.01,12.7 40.64,12.06 46.35,12.06 47.62,13.34 49.53,13.34 50.48,11.75 50.48,11.43 49.85,10.79
  pour Top (isolate 0.254, no thermals): 26.67,10.16 25.08,9.21 25.08,1.91 27.3,-0.32 48.26,-0.32 50.48,1.91 50.48,9.53 49.85,10.16 47.94,10.16 47.62,9.84 29.53,9.84 28.57,10.16
  pour Bottom (isolate 0.406, no thermals): 26.67,10 24.77,9.05 24.77,1.91 26.99,-0.32 48.26,-0.32 50.48,1.91 50.48,8.89 49.21,9.84 47.94,9.84 46.99,9.21 30.91,9.21 30.13,10
  pour Bottom (isolate 0.254, no thermals): 46.35,10.79 49.21,10.79 50.48,12.06 50.48,17.14 49.53,16.51 48.26,16.51 48.9,16.19 49.85,15.24 49.85,13.34 48.9,12.38 48.26,12.38
GND2  (via drill 0.6)
  Top 0.305: v9.53,40.32 DRV3.P$1
  Top 0.343: 10.79,44.45 11.43,44.77 12.38,44.77 R20.1 13.34,45.09 | 8.89,40.32 v9.53,40.32 | 8.89,40.32 8.26,39.69 8.26,38.42 7.62,37.78 C17.- | 8.89,40.32 9.21,40.64 R21.1 9.21,43.18 10.48,44.45 10.79,44.45 | DRV3.P$9 19.05,35.88 v19.68,35.24 | C16.- 5.4,34.61 4.76,28.89 5.71,27.94 GND2.1 5.3,28.48 LED5.C | 10.79,44.45 R22.1
  Top 0.61: 13.34,45.09 13.34,47.31 | 13.34,47.31 v13.34,48.9 | 13.34,47.31 C19.2
  Bottom 0.305: 5.4,34.92 5.4,37.47
  Bottom 0.343: v13.34,48.9 IC2.13
  Bottom 0.381: 6.03,36.97 5.98,37.02
  Bottom 0.61: 21.91,37.78 5V_PWR5.2 | IC2.8 8.95,40.96 v9.53,40.32
  Bottom 0.813: 21.91,37.78 20.64,36.51 7.33,36.51 6.68,37.32 C17.-
  Bottom 1.27: 5V_PWR4.2 4.12,37.78 C15.2 5.08,37.47 5.4,37.47 C17.- | MOTOR_POWER4.1 4.12,35.24 C18.2 5.4,34.92 C16.- 7.32,35.24 v19.68,35.24 MOTOR_POWER5.1 23.18,34.61 26.99,34.61 27.94,35.24
  other vias: 18.41,29.21
  pour Bottom (isolate 0.254, no thermals): 0.64,50.48 23.5,50.48 24.45,49.53 24.45,43.5 22.86,42.5 16.84,42.68 14.45,39.99 7.56,39.99 6.92,39.36 6.93,38.1 8.26,36.83 0.64,36.83 -0.32,37.78 -0.32,49.21
  pour Top (isolate 0.254, no thermals): 0.64,36.83 -0.32,37.78 -0.32,49.21 0.32,50.16 23.81,50.16 24.77,49.21 24.77,47.92 23.63,46.51 22.5,47.81 15.56,43.81 14.61,42.86 14.61,40.96 13.97,40.32 13.97,38.73 14.61,38.1 20.32,38.1 21.09,38.87 23.37,38.87 24,39.5 24,46.5 24.5,47 24.5,47.5 24.77,47.55 24.77,37.78 23.81,36.83
  pour Top (isolate 0.254, no thermals): 0.64,36.2 -0.32,35.24 -0.32,27.94 0.64,26.99 23.81,26.99 24.77,26.94 24.77,35.24 23.81,36.2 21.91,36.2 21.59,35.88 3.49,35.88 2.54,36.2
  pour Bottom (isolate 0.406, no thermals): 0.64,36.04 -0.32,35.09 -0.32,27.94 0.64,26.99 23.5,26.99 24.45,26.94 24.45,34.92 23.18,35.88 21.91,35.88 20.95,35.24 4.88,35.24 4.1,36.04
  pour Bottom (isolate 0.254, no thermals): 20.32,36.83 23.18,36.83 24.45,38.1 24.45,43.18 23.5,42.55 22.23,42.55 22.86,42.23 23.81,41.27 23.81,39.37 22.86,38.42 22.23,38.42
GND3  (via drill 0.6)
  Top 0.305: v35.56,40.32 DRV4.P$1
  Top 0.343: 36.83,44.45 37.47,44.77 38.42,44.77 R28.1 39.37,45.09 | 34.92,40.32 v35.56,40.32 | 34.92,40.32 34.29,39.69 34.29,38.42 33.66,37.78 C24.- | 34.92,40.32 35.24,40.64 R29.1 35.24,43.18 36.51,44.45 36.83,44.45 | DRV4.P$9 45.09,35.88 v45.72,35.24 | C23.- 31.43,34.61 30.8,28.89 31.75,27.94 GND3.1 31.34,28.48 LED7.C | 36.83,44.45 R30.1
  Top 0.61: 39.37,45.09 39.37,47.31 | 39.37,47.31 v39.37,48.9 | 39.37,47.31 C26.2
  Bottom 0.305: 31.43,34.92 31.43,37.47
  Bottom 0.343: v39.37,48.9 IC4.13
  Bottom 0.381: 32.07,36.97 32.02,37.02
  Bottom 0.61: 47.94,37.78 5V_PWR7.2 | IC4.8 34.98,40.96 v35.56,40.32
  Bottom 0.813: 47.94,37.78 46.67,36.51 33.36,36.51 32.72,37.32 C24.-
  Bottom 1.27: MOTOR_POWER7.1 v45.72,35.24 33.36,35.24 32.72,34.61 C23.- 31.43,34.92 C25.2 30.16,35.24 MOTOR_POWER6.1 | 5V_PWR6.2 30.16,37.78 C22.2 31.12,37.47 31.43,37.47 C24.-
  other vias: 44.45,29.21
  pour Bottom (isolate 0.254, no thermals): 26.35,50.48 49.53,50.48 50.48,49.53 50.48,43.5 48.9,42.5 42.87,42.68 40.49,39.99 33.59,39.99 32.96,39.36 32.97,38.1 34.29,36.83 26.99,36.83 26.99,37.15 26.04,38.1 24.77,38.1 24.77,47.62
  pour Top (isolate 0.254, no thermals): 26.67,36.83 25.08,37.78 25.08,49.21 26.35,50.16 49.21,50.16 50.48,48.9 50.48,38.1 49.53,39.69 49.53,43.81 41.59,43.81 40.64,42.86 40.64,40.96 40.01,40.32 40.01,38.73 40.64,38.1 46.35,38.1 47.62,39.37 49.53,39.37 50.48,37.78 50.48,37.47 49.85,36.83
  pour Top (isolate 0.254, no thermals): 26.67,36.2 25.08,35.24 25.08,26.94 26.67,26.99 49.53,26.99 50.48,27.94 50.48,35.56 49.85,36.2 47.94,36.2 47.62,35.88 29.53,35.88 28.57,36.2
  pour Bottom (isolate 0.406, no thermals): 26.67,36.04 24.77,35.09 24.77,26.94 26.35,26.99 49.53,26.99 50.48,27.94 50.48,34.92 49.21,35.88 47.94,35.88 46.99,35.24 30.91,35.24 30.13,36.04
  pour Bottom (isolate 0.254, no thermals): 46.35,36.83 49.21,36.83 50.48,38.1 50.48,43.18 49.53,42.55 48.26,42.55 48.9,42.23 49.85,41.27 49.85,39.37 48.9,38.42 48.26,38.42
LATCH  (via drill 0.6)
  Top 0.61: v7.62,21.75 7.62,20.64 6.99,20 6.67,19.84 5.57,18.81 5.41,18.74 2.53,18.74 COMM_OUT.2
  Bottom 0.343: COMM_IN.2
  Bottom 0.406: IC3.12 12.7,20 13.02,19.68 14.92,19.68 16.99,17.62 20.47,17.62 COMM_IN.2
  Bottom 0.61: v7.62,21.75 7.62,22.27 7.65,22.3 8.1,22.7 11.9,22.7 12.7,21.91 IC3.12
  Bottom 1.27: COMM_IN.2 27.94,19.37
LATCH1  (via drill 0.6)
  Top 0.61: v33.66,21.75 33.66,20.64 33.02,20 32.7,19.84 31.6,18.81 31.45,18.74 28.56,18.74 COMM_OUT1.2
  Bottom 0.343: COMM_IN1.2
  Bottom 0.406: IC1.12 38.73,20 39.05,19.68 40.96,19.68 43.02,17.62 46.51,17.62 COMM_IN1.2
  Bottom 0.61: v33.66,21.75 33.66,22.27 33.68,22.3 34.13,22.7 37.94,22.7 38.73,21.91 IC1.12
LATCH2  (via drill 0.6)
  Top 0.61: v7.62,47.79 7.62,46.67 6.99,46.04 6.67,45.88 5.57,44.85 5.41,44.77 2.53,44.78 COMM_OUT2.2
  Bottom 0.343: COMM_IN2.2
  Bottom 0.406: IC2.12 12.7,46.04 13.02,45.72 14.92,45.72 16.99,43.65 20.47,43.65 COMM_IN2.2
  Bottom 0.61: v7.62,47.79 7.62,48.3 7.65,48.33 8.1,48.74 11.9,48.74 12.7,47.94 IC2.12
  Bottom 1.27: COMM_IN2.2 22.23,45.27 22.5,45 27.64,45 27.94,45.4
LATCH3  (via drill 0.6)
  Top 0.61: v33.66,47.79 33.66,46.67 33.02,46.04 32.7,45.88 31.6,44.85 31.45,44.77 28.56,44.78 COMM_OUT3.2
  Bottom 0.343: COMM_IN3.2
  Bottom 0.406: IC4.12 38.73,46.04 39.05,45.72 40.96,45.72 43.02,43.65 46.51,43.65 COMM_IN3.2
  Bottom 0.61: v33.66,47.79 33.66,48.3 33.68,48.33 34.13,48.74 37.94,48.74 38.73,47.94 IC4.12
M1IN1  (via drill 0.6)
  Top 0.343: DRV1.P$15 19.05,13.65 19.68,14.29 v19.68,14.61
  Bottom 0.61: v19.68,14.61 18.73,15.56 17.78,15.56 IC3.1
M1IN2  (via drill 0.6)
  Top 0.343: v19.68,13.02 DRV1.P$14
  Bottom 0.406: v19.68,13.02 19.53,13.02 19.47,12.96 18.42,13.97 17.46,13.97 16.51,14.92 IC3.2
M1IN3  (via drill 0.6)
  Top 0.343: DRV2.P$15 45.09,13.65 45.72,14.29 v45.72,14.61
  Bottom 0.61: v45.72,14.61 44.77,15.56 43.81,15.56 IC1.1
M1IN4  (via drill 0.6)
  Top 0.343: v45.72,13.02 DRV2.P$14
  Bottom 0.406: v45.72,13.02 45.56,13.02 45.51,12.96 44.46,13.97 43.5,13.97 42.55,14.92 IC1.2
M1IN5  (via drill 0.6)
  Top 0.343: DRV3.P$15 19.05,39.69 19.68,40.32 v19.68,40.64
  Bottom 0.61: v19.68,40.64 18.73,41.59 17.78,41.59 IC2.1
M1IN6  (via drill 0.6)
  Top 0.343: v19.68,39.05 DRV3.P$14
  Bottom 0.406: v19.68,39.05 19.53,39.05 19.47,38.99 18.42,40.01 17.46,40.01 16.51,40.96 IC2.2
M1IN7  (via drill 0.6)
  Top 0.343: DRV4.P$15 45.09,39.69 45.72,40.32 v45.72,40.64
  Bottom 0.61: v45.72,40.64 44.77,41.59 43.81,41.59 IC4.1
M1IN8  (via drill 0.6)
  Top 0.343: v45.72,39.05 DRV4.P$14
  Bottom 0.406: v45.72,39.05 45.56,39.05 45.51,38.99 44.46,40.01 43.5,40.01 42.55,40.96 IC4.2
M1PWM  (via drill 0.6)
  Top 0.61: R5.2 17.78,18.73 v18.41,19.37
  Bottom 0.406: IC3.15 16.51,20.64 17.78,19.37 v18.41,19.37
M1PWM1  (via drill 0.6)
  Top 0.61: R11.2 43.81,18.73 v44.45,19.37
  Bottom 0.406: IC1.15 42.55,20.64 43.81,19.37 v44.45,19.37
M1PWM2  (via drill 0.6)
  Top 0.61: R19.2 17.78,44.77 v18.41,45.4
  Bottom 0.406: IC2.15 16.51,46.67 17.78,45.4 v18.41,45.4
M1PWM3  (via drill 0.6)
  Top 0.61: R27.2 43.81,44.77 v44.45,45.4
  Bottom 0.406: IC4.15 42.55,46.67 43.81,45.4 v44.45,45.4
M1STDBY  (via drill 0.6)
  Top 0.343: DRV1.P$12 15.88,11.75 15.56,12.06 v15.56,12.7
  Top 0.61: v14.92,17.14 14.93,18.73 R7.2
  Bottom 0.406: v15.56,12.7 14.76,13.5 14.76,14.44 15.24,14.92 IC3.3
  Bottom 0.61: IC3.3 15.24,16.83 v14.92,17.14
M1STDBY1  (via drill 0.6)
  Top 0.343: DRV2.P$12 41.91,11.75 41.59,12.06 v41.59,12.7
  Top 0.61: v40.96,17.14 40.97,18.73 R12.2
  Bottom 0.406: v41.59,12.7 40.8,13.5 40.8,14.44 41.27,14.92 IC1.3
  Bottom 0.61: IC1.3 41.27,16.83 v40.96,17.14
M1STDBY2  (via drill 0.6)
  Top 0.343: DRV3.P$12 15.88,37.78 15.56,38.1 v15.56,38.73
  Top 0.61: v14.92,43.18 14.93,44.77 R20.2
  Bottom 0.406: v15.56,38.73 14.76,39.53 14.76,40.48 15.24,40.96 IC2.3
  Bottom 0.61: IC2.3 15.24,42.86 v14.92,43.18
M1STDBY3  (via drill 0.6)
  Top 0.343: DRV4.P$12 41.91,37.78 41.59,38.1 v41.59,38.73
  Top 0.61: v40.96,43.18 40.97,44.77 R28.2
  Bottom 0.406: v41.59,38.73 40.8,39.53 40.8,40.48 41.27,40.96 IC4.3
  Bottom 0.61: IC4.3 41.27,42.86 v40.96,43.18
M2IN1  (via drill 0.6)
  Top 0.343: DRV1.P$2 13.02,13.65 v13.65,14.29
  Bottom 0.406: 13.32,14.29 13.25,14.36
  Bottom 0.61: v13.65,14.29 13.32,14.29 | 13.25,14.36 12.71,14.92 IC3.5
M2IN2  (via drill 0.6)
  Top 0.343: DRV1.P$3 v13.65,13.02
  Bottom 0.61: v13.65,13.02 12.23,13.02 11.44,13.96 IC3.6
M2IN3  (via drill 0.6)
  Top 0.343: DRV2.P$2 39.05,13.65 v39.69,14.29
  Bottom 0.406: 39.36,14.29 39.28,14.36
  Bottom 0.61: v39.69,14.29 39.36,14.29 | 39.28,14.36 38.75,14.92 IC1.5
M2IN4  (via drill 0.6)
  Top 0.343: DRV2.P$3 v39.69,13.02
  Bottom 0.61: v39.69,13.02 38.26,13.02 37.48,13.96 IC1.6
M2IN5  (via drill 0.6)
  Top 0.343: DRV3.P$2 13.02,39.69 v13.65,40.32
  Bottom 0.406: 13.32,40.32 13.25,40.4
  Bottom 0.61: v13.65,40.32 13.32,40.32 | 13.25,40.4 12.71,40.95 IC2.5
M2IN6  (via drill 0.6)
  Top 0.343: DRV3.P$3 v13.65,39.05
  Bottom 0.61: v13.65,39.05 12.23,39.05 11.44,39.99 IC2.6
M2IN7  (via drill 0.6)
  Top 0.343: DRV4.P$2 39.05,39.69 v39.69,40.32
  Bottom 0.406: 39.36,40.32 39.28,40.4
  Bottom 0.61: v39.69,40.32 39.36,40.32 | 39.28,40.4 38.75,40.95 IC4.5
M2IN8  (via drill 0.6)
  Top 0.343: DRV4.P$3 v39.69,39.05
  Bottom 0.61: v39.69,39.05 38.26,39.05 37.48,39.99 IC4.6
M2PWM
  Bottom 0.406: IC3.4 13.97,18.1 13.65,18.41 12.38,18.41 11.9,17.94 10.63,17.94 10.16,17.46 8.89,17.46 8.26,16.83 6.99,16.83 6.67,17.14 6.67,18.41 6.35,18.73 5.72,18.73 R4.1
M2PWM1
  Bottom 0.406: IC1.4 40.01,18.1 39.69,18.41 38.42,18.41 37.94,17.94 36.67,17.94 36.2,17.46 34.92,17.46 34.29,16.83 33.02,16.83 32.7,17.14 32.7,18.41 32.38,18.73 31.75,18.73 R10.1
M2PWM2
  Bottom 0.406: IC2.4 13.97,44.13 13.65,44.45 12.38,44.45 11.9,43.97 10.63,43.97 10.16,43.5 8.89,43.5 8.26,42.86 6.99,42.86 6.67,43.18 6.67,44.45 6.35,44.77 5.72,44.77 R18.1
M2PWM3
  Bottom 0.406: IC4.4 40.01,44.13 39.69,44.45 38.42,44.45 37.94,43.97 36.67,43.97 36.2,43.5 34.92,43.5 34.29,42.86 33.02,42.86 32.7,43.18 32.7,44.45 32.38,44.77 31.75,44.77 R26.1
M2STDBY  (via drill 0.6)
  Top 0.343: DRV1.P$5 14.29,11.75 14.61,12.06 14.61,15.56
  Top 0.61: 14.61,15.56 14.29,15.88 13.65,15.88 13.02,16.51 | 13.02,16.51 R6.2 | 13.02,16.51 v13.02,17.46
  Bottom 0.406: IC3.7 10.16,16.19 11.11,17.14 12.7,17.14 v13.02,17.46
M2STDBY1  (via drill 0.6)
  Top 0.343: DRV2.P$5 40.32,11.75 40.64,12.06 40.64,15.56
  Top 0.61: 40.64,15.56 40.32,15.88 39.69,15.88 39.05,16.51 | 39.05,16.51 R13.2 | 39.05,16.51 v39.05,17.46
  Bottom 0.406: IC1.7 36.2,16.19 37.15,17.14 38.73,17.14 v39.05,17.46
M2STDBY2  (via drill 0.6)
  Top 0.343: DRV3.P$5 14.29,37.78 14.61,38.1 14.61,41.59
  Top 0.61: 14.61,41.59 14.29,41.91 13.65,41.91 13.02,42.55 | 13.02,42.55 R21.2 | 13.02,42.55 v13.02,43.5
  Bottom 0.406: IC2.7 10.16,42.23 11.11,43.18 12.7,43.18 v13.02,43.5
M2STDBY3  (via drill 0.6)
  Top 0.343: DRV4.P$5 40.32,37.78 40.64,38.1 40.64,41.59
  Top 0.61: 40.64,41.59 40.32,41.91 39.69,41.91 39.05,42.55 | 39.05,42.55 R29.2 | 39.05,42.55 v39.05,43.5
  Bottom 0.406: IC4.7 36.2,42.23 37.15,43.18 38.73,43.18 v39.05,43.5
MOTOR_1+
  Top 0.343: DRV1.P$11 15.24,11.11 15.4,10.95
  Top 0.813: M1.1 14.61,2.86 15.55,3.81 15.55,7.94 | 15.55,7.94 R3.1 | 15.55,7.94 15.4,8.26 15.4,10.95
MOTOR_1+1
  Top 0.343: DRV2.P$11 41.27,11.11 41.43,10.95
  Top 0.813: M4.1 40.64,2.86 41.59,3.81 41.59,7.94 | 41.59,7.94 R16.1 | 41.59,7.94 41.43,8.26 41.43,10.95
MOTOR_1+2
  Top 0.343: DRV3.P$11 15.24,37.15 15.4,36.99
  Top 0.813: M6.1 14.61,28.89 15.55,29.84 15.55,33.97 | 15.55,33.97 R24.1 | 15.55,33.97 15.4,34.29 15.4,36.99
MOTOR_1+3
  Top 0.343: DRV4.P$11 41.27,37.15 41.43,36.99
  Top 0.813: M8.1 40.64,28.89 41.59,29.84 41.59,33.97 | 41.59,33.97 R32.1 | 41.59,33.97 41.43,34.29 41.43,36.99
MOTOR_1-
  Top 0.343: DRV1.P$10 20,10.48 20.64,9.84 20.64,8.26 19.05,6.67 19.37,5.56
  Top 0.813: M1.2 17.14,4.45 18.73,4.45 19.37,5.1 19.37,5.56 | 19.37,5.56 19.37,5.55 | 19.37,5.56 C3.1
MOTOR_1-1
  Top 0.343: DRV2.P$10 46.04,10.48 46.67,9.84 46.67,8.26 45.09,6.67 45.4,5.56
  Top 0.813: M4.2 43.18,4.45 44.77,4.45 45.4,5.1 45.4,5.56 | 45.4,5.56 45.4,5.55 | 45.4,5.56 C14.1
MOTOR_1-2
  Top 0.343: DRV3.P$10 20,36.51 20.64,35.88 20.64,34.29 19.05,32.7 19.37,31.59
  Top 0.813: M6.2 17.14,30.48 18.73,30.48 19.37,31.13 19.37,31.59 | 19.37,31.59 | 19.37,31.59 C21.1
MOTOR_1-3
  Top 0.343: DRV4.P$10 46.04,36.51 46.67,35.88 46.67,34.29 45.09,32.7 45.4,31.59
  Top 0.813: M8.2 43.18,30.48 44.77,30.48 45.4,31.13 45.4,31.59 | 45.4,31.59 | 45.4,31.59 C28.1
MOTOR_2+
  Top 0.343: 13.97,10.32 13.65,10.48 DRV1.P$7
  Top 0.813: M2.2 12.06,2.54 13.97,4.45 13.96,5.44 C2.1 13.97,6.35 13.97,6.67 13.97,10.32
MOTOR_2+1
  Top 0.343: 40.01,10.32 39.69,10.48 DRV2.P$7
  Top 0.813: M3.2 38.1,2.54 40.01,4.45 40,5.44 C13.1 40,6.35 40.01,6.67 40.01,10.32
MOTOR_2+2
  Top 0.343: 13.97,36.36 13.65,36.51 DRV3.P$7
  Top 0.813: M5.2 12.06,28.57 13.97,30.48 13.96,31.47 C20.1 13.97,32.38 13.97,32.7 13.97,36.36
MOTOR_2+3
  Top 0.343: 40.01,36.36 39.69,36.51 DRV4.P$7
  Top 0.813: M7.2 38.1,28.57 40.01,30.48 40,31.47 C27.1 40,32.38 40.01,32.7 40.01,36.36
MOTOR_2-
  Top 0.343: DRV1.P$8 9.7,9.84 9.68,9.68
  Top 0.813: M2.1 9.53,3.17 10.48,4.13 10.48,5.4 9.68,6.35 9.68,8.07 R1.1 9.69,8.12 9.68,9.68
MOTOR_2-1
  Top 0.343: DRV2.P$8 35.73,9.84 35.72,9.68
  Top 0.813: M3.1 35.56,3.17 36.51,4.13 36.51,5.4 35.72,6.35 35.72,8.07 R15.1 35.72,8.12 35.72,9.68
MOTOR_2-2
  Top 0.343: DRV3.P$8 9.7,35.88 9.68,35.72
  Top 0.813: M5.1 9.53,29.21 10.48,30.16 10.48,31.43 9.68,32.39 9.68,34.11 R23.1 9.69,34.16 9.68,35.72
MOTOR_2-3
  Top 0.343: DRV4.P$8 35.73,35.88 35.72,35.72
  Top 0.813: M7.1 35.56,29.21 36.51,30.16 36.51,31.43 35.72,32.39 35.72,34.11 R31.1 35.72,34.16 35.72,35.72
N$1  (via drill 0.6)
  Top 0.406: LED1.A v9.37,4.92
  Bottom 0.406: v9.37,4.92 9.68,5.08 R2.1
N$2
  Top 0.343: R14.2 36.95,20.75
  Top 0.61: 36.95,20.75 37.15,20.95 37.15,21.91 LED4.C
N$3
  Top 0.813: C2.2 12.39,6.67 12.39,7.62 R1.2
N$4
  Top 0.813: C13.2 38.42,6.67 38.42,7.62 R15.2
N$5
  Top 0.813: C14.2 43.5,7.62 R16.2
N$6
  Top 0.813: C3.2 17.46,7.62 R3.2
N$7  (via drill 0.6)
  Top 0.406: LED3.A v35.4,4.92
  Bottom 0.406: v35.4,4.92 35.72,5.08 R9.1
N$8
  Top 0.343: R22.2 10.91,46.78
  Top 0.61: 10.91,46.78 10.91,46.79 11.11,46.99 11.11,47.94 LED6.C
N$9
  Top 0.813: C20.2 12.39,32.7 12.39,33.66 R23.2
N$10
  Top 0.343: R8.2 10.91,20.75
  Top 0.61: 10.91,20.75 11.11,20.95 11.11,21.91 LED2.C
N$11
  Top 0.813: C21.2 17.46,33.66 R24.2
N$12  (via drill 0.6)
  Top 0.406: LED5.A v9.37,30.96
  Bottom 0.406: v9.37,30.96 9.68,31.11 R17.1
N$13
  Top 0.343: R30.2 36.95,46.78
  Top 0.61: 36.95,46.78 36.95,46.79 37.15,46.99 37.15,47.94 LED8.C
N$14
  Top 0.813: C27.2 38.42,32.7 38.42,33.66 R31.2
N$15
  Top 0.813: C28.2 43.5,33.66 R32.2
N$16  (via drill 0.6)
  Top 0.406: LED7.A v35.4,30.96
  Bottom 0.406: v35.4,30.96 35.72,31.11 R25.1
PWM_1
  Top 0.343: DRV1.P$13 19.05,12.38 19.37,12.06 20.32,12.06 20.64,12.38 20.64,15.4 20.61,15.4 | 19.78,17.32 R5.1
  Top 0.406: 20.61,15.4 19.78,16.23 19.78,17.32
  Top 0.61: PWM1.1 R5.1
PWM_2  (via drill 0.6)  (1 unrouted)
  Top 0.343: DRV1.P$4 9.53,12.38 9.21,12.7 v9.21,13.02
  Bottom 0.343: R4.2 5.4,16.83
  Bottom 0.406: v9.21,13.02 7.96,14.36 7.96,15.29 7.34,15.92 6.25,15.92 5.56,16.82 R4.2
  Bottom 0.61: PWM2.1 3.65,21.11 3.65,17.94 4.13,17.46 4.76,17.46
PWM_3
  Top 0.343: DRV2.P$13 45.09,12.38 45.4,12.06 46.35,12.06 46.67,12.38 46.67,15.4 46.65,15.4 | 45.82,17.32 R11.1
  Top 0.406: 46.65,15.4 45.82,16.23 45.82,17.32
  Top 0.61: PWM4.1 R11.1
PWM_4  (via drill 0.6)  (1 unrouted)
  Top 0.343: DRV2.P$4 35.56,12.38 35.24,12.7 v35.24,13.02
  Bottom 0.343: R10.2 31.43,16.83
  Bottom 0.406: v35.24,13.02 33.99,14.36 33.99,15.29 33.37,15.92 32.28,15.92 31.59,16.82 R10.2
  Bottom 0.61: PWM3.1 29.68,21.11 29.68,17.94 30.16,17.46 30.8,17.46
PWM_5
  Top 0.343: DRV3.P$13 19.05,38.42 19.37,38.1 20.32,38.1 20.64,38.42 20.64,41.43 20.61,41.43 | 19.78,43.35 R19.1
  Top 0.406: 20.61,41.43 19.78,42.26 19.78,43.35
  Top 0.61: PWM6.1 R19.1
PWM_6  (via drill 0.6)  (1 unrouted)
  Top 0.343: DRV3.P$4 9.53,38.42 9.21,38.73 v9.21,39.05
  Bottom 0.343: R18.2 5.4,42.86
  Bottom 0.406: v9.21,39.05 7.96,40.4 7.96,41.33 7.34,41.95 6.25,41.95 5.56,42.86 R18.2
  Bottom 0.61: PWM5.1 3.65,47.15 3.65,43.98 4.13,43.5 4.76,43.5
PWM_7
  Top 0.343: DRV4.P$13 45.09,38.42 45.4,38.1 46.35,38.1 46.67,38.42 46.67,41.43 46.65,41.43 | 45.82,43.35 R27.1
  Top 0.406: 46.65,41.43 45.82,42.26 45.82,43.35
  Top 0.61: PWM8.1 R27.1
PWM_8  (via drill 0.6)  (1 unrouted)
  Top 0.343: DRV4.P$4 35.56,38.42 35.24,38.73 v35.24,39.05
  Bottom 0.343: R26.2 31.43,42.86
  Bottom 0.406: v35.24,39.05 33.99,40.4 33.99,41.33 33.37,41.95 32.28,41.95 31.59,42.86 R26.2
  Bottom 0.61: PWM7.1 29.68,47.15 29.68,43.98 30.16,43.5 30.8,43.5
VCC
  Top 0.33: DRV1.P$6 9.53,11.11 8.57,10.16
  Top 0.61: 8.57,10.16 5.08,10.16 4.45,9.53 4.45,7.94 3.17,6.67 MOTOR_POWER.2
  Bottom 0.406: 11.11,7.62 R2.2
  Bottom 1.27: MOTOR_POWER.2 4.44,6.67 C9.1 5.4,6.03 C5.+ 7.62,6.03 9.21,7.62 11.11,7.62 19.39,7.62 20.25,6.74 22.12,6.74 MOTOR_POWER1.2 27.94,6.67
VCC1
  Top 0.33: DRV2.P$6 35.56,11.11 34.61,10.16
  Top 0.61: 34.61,10.16 31.11,10.16 30.48,9.53 30.48,7.94 29.21,6.67 MOTOR_POWER2.2
  Bottom 0.406: 37.15,7.62 R9.2
  Bottom 1.27: MOTOR_POWER3.2 48.15,6.74 46.28,6.74 45.42,7.62 37.15,7.62 35.24,7.62 33.66,6.03 C6.+ 31.43,6.03 C11.1 30.47,6.67 MOTOR_POWER2.2
VCC2
  Top 0.33: DRV3.P$6 9.53,37.15 8.57,36.2
  Top 0.61: 8.57,36.2 5.08,36.2 4.45,35.56 4.45,33.97 3.17,32.7 MOTOR_POWER4.2
  Bottom 0.406: 11.11,33.66 R17.2
  Bottom 1.27: MOTOR_POWER4.2 4.44,32.7 C18.1 5.4,32.07 C16.+ 7.62,32.07 9.21,33.66 11.11,33.66 19.39,33.66 20.25,32.77 22.12,32.77 MOTOR_POWER5.2 27.94,32.7
VCC3
  Top 0.33: DRV4.P$6 35.56,37.15 34.61,36.2
  Top 0.61: 34.61,36.2 31.11,36.2 30.48,35.56 30.48,33.97 29.21,32.7 MOTOR_POWER6.2
  Bottom 0.406: 37.15,33.66 R25.2
  Bottom 1.27: MOTOR_POWER7.2 48.15,32.77 46.28,32.77 45.42,33.66 37.15,33.66 35.24,33.66 33.66,32.07 C23.+ 31.43,32.07 C25.1 30.47,32.7 MOTOR_POWER6.2

## Text on the board
_tsilk: Data | Data | DataOut | PWM2 | + | PWM1 | DIn | DataOut | PWM2 | + | PWM1 | DIn | Ltch | Ltch | Latch | Latch | Clock | Clock | + | Clock | + | Clock | Logic | Logic | +5V | TB6552 | +5V | +5V | TB6552 | +5V | Logic | Logic | GND | GND | - | Logic | GND | - | Logic | GND | Motor | - | Motor | - | GND | GND | GND | GND | VCC | Motor | VCC | Motor | VCC | VCC | Power | + | Power | + | + | + | Motor2 | Motor1 | Motor2 | Motor1 | GND | - | + | + | - | GND | - | + | + | - | Data | Data | DataOut | PWM2 | + | PWM1 | DIn | DataOut | PWM2 | + | PWM1 | DIn | Ltch | Ltch | Latch | Latch | Clock | Clock | + | Clock | + | Clock | Logic | Logic | +5V | TB6552 | +5V | TB6552 | Logic | +5V | Logic | +5V | GND | GND | - | Logic | GND | - | Logic | GND | Motor | - | Motor | - | GND | GND | GND | GND | VCC | Motor | VCC | Motor | VCC | VCC | Power | + | Power | + | + | + | Motor2 | Motor1 | Motor2 | Motor1 | GND | - | + | + | - | GND | - | + | + | -
_bsilk: PWM2 | PWM1 | PWM2 | PWM1 | DIn | DIn | + | + | DOut | Latch | DOut | Latch | Latch | Latch | CLK | CLK | CLK | CLK | Logic | +5V | Logic | +5V | +5V | +5V | Logic | Logic | Logic | Logic | GND | GND | GND | Logic | ver. 1.0 | uMoto | GND | Logic | ver. 1.0 | uMoto | by zzorn in 2013 | Motor | GND | by zzorn in 2013 | Motor | GND | GND | github.com/zzorn/umoto | GND | github.com/zzorn/umoto | Motor | Motor | Motor | VCC | Motor | VCC | VCC | Motor | VCC | Motor | M2- | + | M2+ | M1+ | M1- | M2- | + | M2+ | M1+ | M1- | GND | GND | PWM2 | PWM1 | DIn | PWM2 | PWM1 | DIn | + | + | DOut | DOut | Latch | Latch | Latch | Latch | CLK | CLK | CLK | CLK | Logic | +5V | Logic | +5V | +5V | +5V | Logic | Logic | Logic | Logic | GND | GND | GND | GND | Logic | ver. 1.0 | uMoto | Logic | ver. 1.0 | uMoto | by zzorn in 2013 | Motor | GND | by zzorn in 2013 | Motor | GND | GND | github.com/zzorn/umoto | github.com/zzorn/umoto | Motor | GND | Motor | Motor | VCC | Motor | VCC | VCC | Motor | VCC | Motor | + | + | GND | M2- | M2+ | M1+ | M1- | GND | M2- | M2+ | M1+ | M1-